# Altium PCB Control_Board_Model_C_Rigid_Flex_Flipped.PcbDoc (part 3 of 8)
Units mil, origin at the board's own origin, x right, y up, seen from the top; angles counter-clockwise.
Board outline 3417.32 x 2110.24 mil, 6 copper layers (1-Sig/GND, 2-Sig, 3-GND, 4-Sig/Pwr, 5-Sig, 6-Sig/GND), stack 39.291 mil thick; 418 components, 342 nets, 1601 pads, 44 vias.
Unrouted connection lines stored in the file: 13.
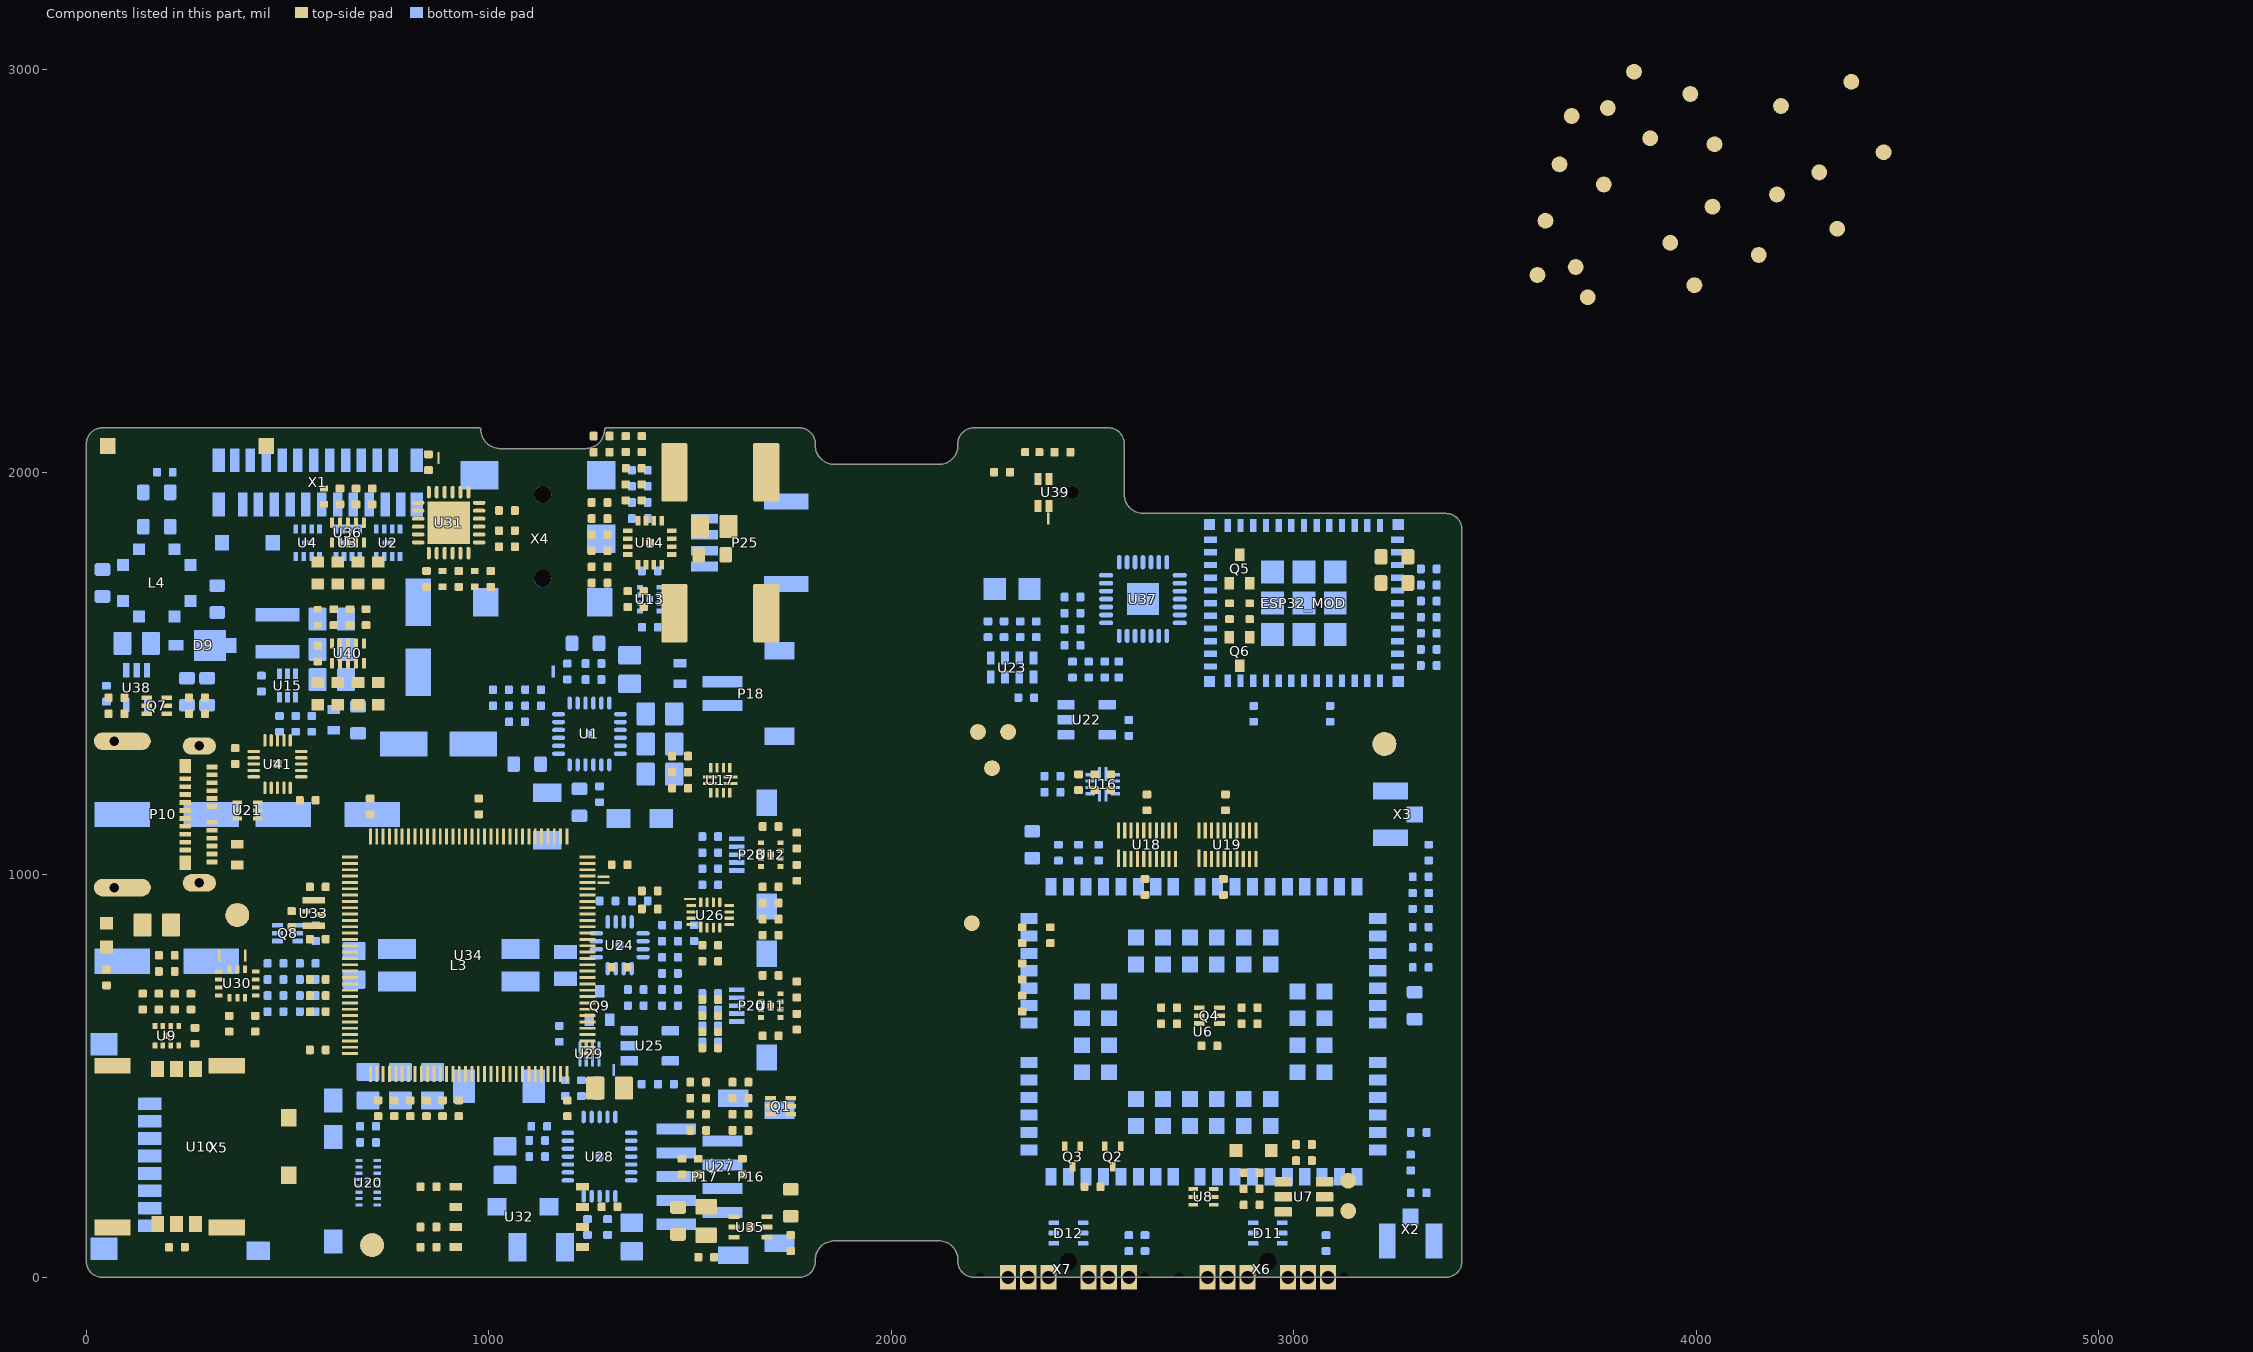
[diagram p6: the components of this part, seen from the top]

## Part data (continued)
C14 C15 C16 C17 C19 C20 C33 C34 C35 C36 C50 C53 C54 C55 C56 C57 C58 C60 C64 C65 C66 C67 C71 C72 C74 C82 C85 C88 C93 C94 C99 C104 C105 C106 C108 C109 C110 C111 C112 C113 C114 C115 C116 C118 C120 C130 C133 C135 C139 C145 C146 C148: "0.1µF ±10% 50V Ceramic Capacitor X7R 0402 (1005 Metric)", Capacitance=100nF, Case/Package=0402, Case Code (Metric)=1005, Dielectric=X7R, Manufacturer=TDK, Manufacturer Part Number=CGA2B3X7R1H104K050BB, Max Operating Temperature=125°C, Min Operating Temperature=-55°C, Package Quantity=1, Ratings=AEC-Q200, Supplier Part Number 1=445-6899-1-ND, Tolerance=10%, Voltage=50V, Case Code (Imperial)=0402, ComponentLink1Description=http://product.tdk.com/capacitor/mlcc/en/documents/mlccspec_automotive_general_midvoltage_en.pdf?src-supplier=Future+Electronics, ComponentLink1URL=http://product.tdk.com/capacitor/mlcc/en/documents/mlccspec_automotive_general_midvoltage_en.pdf?src-supplier=Future+Electronics, ComponentLink2Description=http://www.farnell.com/datasheets/1807242.pdf?src-supplier=Element14, ComponentLink2URL=http://www.farnell.com/datasheets/1807242.pdf?src-supplier=Element14, ComponentLink3Description=http://www.mouser.com/ds/2/400/lcc_automotive_general_en-843974.pdf?src-supplier=Mouser, ComponentLink3URL=http://www.mouser.com/ds/2/400/lcc_automotive_general_en-843974.pdf?src-supplier=Mouser, ComponentLink4Description=http://www.farnell.com/datasheets/1936565.pdf?src-supplier=Element14, ComponentLink4URL=http://www.farnell.com/datasheets/1936565.pdf?src-supplier=Element14, ComponentLink5Description=http://www.farnell.com/datasheets/1735392.pdf?src-supplier=Element14, ComponentLink5URL=http://www.farnell.com/datasheets/1735392.pdf?src-supplier=Element14, Composition=Ceramic, Depth=0.5mm, Height=0.5mm, Lead Free="Lead Free", Length=1mm, Mount="Surface Mount", Packaging="Tape and Reel", Pricing 1="1=0.17, 10=0.118, 50=0.0668, 100=0.0553, 500=0.0388, 1000=0.0321, 2500=0.0299, 5000=0.0273 (USD)", REACH SVHC="No SVHC", Stock 1=2925303, Supplier 1=Digi-Key, Termination=SMD/SMT, Thickness=0.022inch, Voltage Rating=50V, Voltage Rating (DC)=50V, Weight=2.3E-05oz, Width=0.02inch
  C17 C19 C20: ClassName=P109
  C64 C65 C66: ClassName=STM32G473CETx
  C105: ClassName=MCU
C18 C59 C83 C84: "2.2µF ±20% 6.3V Ceramic Capacitor X5R 0402 (1005 Metric)", Capacitance=2.2uF, Case/Package=0402, Case Code (Metric)=1005, Dielectric=X5R, Manufacturer=Murata, Manufacturer Part Number=GRM155R60J225ME15D, Max Operating Temperature=85°C, Min Operating Temperature=-55°C, Package Quantity=10000, Supplier Part Number 1=490-4519-1-ND, Tolerance=20%, Voltage=6.3V, Case Code (Imperial)=0402, ComponentLink1Description=https://www.murata.com/~/media/webrenewal/support/library/catalog/products/capacitor/mlcc/c02e.ashx?la=en-us&src-supplier=Digi-Key, ComponentLink1URL=https://www.murata.com/~/media/webrenewal/support/library/catalog/products/capacitor/mlcc/c02e.ashx?la=en-us&src-supplier=Digi-Key, ComponentLink2Description=http://www.murata.com/~/media/webrenewal/support/library/catalog/products/capacitor/mlcc/c02e.ashx?src-supplier=Avnet, ComponentLink2URL=http://www.murata.com/~/media/webrenewal/support/library/catalog/products/capacitor/mlcc/c02e.ashx?src-supplier=Avnet, ComponentLink3Description=http://www.farnell.com/datasheets/2047859.pdf?src-supplier=Element14, ComponentLink3URL=http://www.farnell.com/datasheets/2047859.pdf?src-supplier=Element14, ComponentLink4Description=https://produktinfo.conrad.com/datenblaetter/450000-474999/450128-da-01-de-VS_KONDENS_GRM155_R60J_225ME15D.pdf?src-supplier=Conrad, ComponentLink4URL=https://produktinfo.conrad.com/datenblaetter/450000-474999/450128-da-01-de-VS_KONDENS_GRM155_R60J_225ME15D.pdf?src-supplier=Conrad, Depth=0.5mm, Height=0.5mm, Lead Free="Lead Free", Length=1mm, Material=Ceramic, Mount="Surface Mount", Packaging="Tape and Reel", Pricing 1="1=0.29, 10=0.199, 100=0.1009, 500=0.0691, 1000=0.0611, 2500=0.0584, 5000=0.0531 (USD)", Radiation Hardening=No, REACH SVHC="No SVHC", Stock 1=4444410, Supplier 1=Digi-Key, Termination=SMD/SMT, Thickness=0.022inch, Voltage Rating=6.3V, Voltage Rating (DC)=6.3V, Width=0.02inch
  C18: ClassName=P109
C21 C22: "33pF ±5% 50V Ceramic Capacitor C0G, NP0 0402 (1005 Metric)", Capacitance=33pF, Case/Package=0402, Case Code (Metric)=1005, Dielectric=C0G, Dielectric Material=Ceramic, Insulation Resistance=100GR, Manufacturer=Yageo, Manufacturer Part Number=CC0402JRNPO9BN330, Max Operating Temperature=125°C, Min Operating Temperature=-55°C, Package Quantity=1, Supplier Part Number 1=311-1020-1-ND, Tolerance=5%, Voltage Rating=50V, Case Code (Imperial)=0402, ClassName=P109, ComponentLink1Description=https://www.verical.com/server-webapp/html/getDatasheet?partID=403453&src-supplier=Verical, ComponentLink1URL=https://www.verical.com/server-webapp/html/getDatasheet?partID=403453&src-supplier=Verical, ComponentLink2Description=http://www.farnell.com/datasheets/2213336.pdf?src-supplier=Element14, ComponentLink2URL=http://www.farnell.com/datasheets/2213336.pdf?src-supplier=Element14, ComponentLink3Description=http://www.mouser.com/ds/2/447/Yageo_UPY-GP_NP0_16V-to-50V_9-358835.pdf?src-supplier=Mouser, ComponentLink3URL=http://www.mouser.com/ds/2/447/Yageo_UPY-GP_NP0_16V-to-50V_9-358835.pdf?src-supplier=Mouser, ComponentLink4Description=http://www.yageo.com/documents/recent/UPY-GP_NP0_16V-to-50V_16.pdf?src-supplier=Digi-Key, ComponentLink4URL=http://www.yageo.com/documents/recent/UPY-GP_NP0_16V-to-50V_16.pdf?src-supplier=Digi-Key, ComponentLink5Description=http://www.yageo.com/documents/recent/UPY-GP_NP0_16V-to-50V_8.pdf?src-supplier=Avnet+Europe, ComponentLink5URL=http://www.yageo.com/documents/recent/UPY-GP_NP0_16V-to-50V_8.pdf?src-supplier=Avnet+Europe, Composition=Ceramic, Depth=0.5mm, Height=0.5mm, Lead Free="Lead Free", Length=1mm, Mount="Surface Mount", Number of Pins=2, Packaging="Tape and Reel", Pricing 1="1=0.1, 10=0.022, 100=0.0099, 500=0.0071, 1000=0.0056, 2500=0.0051, 5000=0.0047 (USD)", Radiation Hardening=No, REACH SVHC="No SVHC", Stock 1=622219, Supplier 1=Digi-Key, Termination=SMD/SMT, Thickness=0.022inch, Voltage Rating (DC)=50V, Weight=2.3E-05oz, Width=0.5mm
C23 C24 C96: "10pF ±10% 50V Ceramic Capacitor C0G, NP0 0402 (1005 Metric)", Capacitance=10pF, Case/Package=0402, Case Code (Metric)=1005, Dielectric=C0G, Dielectric Material=Ceramic, Manufacturer=KEMET, Manufacturer Part Number=C0402C100K5GACTU, Max Operating Temperature=125°C, Min Operating Temperature=-55°C, Package Quantity=10000, Supplier Part Number 1=399-7747-1-ND, Tolerance=10%, Voltage Rating=50V, Case Code (Imperial)=0402, ComponentLink1Description=http://www.mouser.com/ds/2/212/KEM_C1003_C0G_SMD-1101588.pdf?src-supplier=Mouser, ComponentLink1URL=http://www.mouser.com/ds/2/212/KEM_C1003_C0G_SMD-1101588.pdf?src-supplier=Mouser, Depth=0.5mm, Dissipation Factor=0.1%, Height=0.5mm, Lead Free="Lead Free", Lead Pitch=0.3mm, Length=1mm, Mount="Surface Mount", Packaging="Tape and Reel", Pricing 1="1=0.1, 10=0.021, 50=0.0116, 100=0.0095, 500=0.0068, 1000=0.0053, 2500=0.0048, 5000=0.0045 (USD)", Radiation Hardening=No, REACH SVHC="No SVHC", Stock 1=57093, Supplier 1=Digi-Key, Termination=SMD/SMT, Thickness=0.022inch, Voltage Rating (DC)=50V, Width=0.02inch
  C23 C24: ClassName=P109
C25 C26: "100µF 6.3V Aluminum Electrolytic Capacitors Radial, Can - SMD  2000 Hrs @ 105°C", Capacitance=100uF, Capacitance Tolerance=+/-20%, Case/Package=Radial, Leakage Current=6.3uA, Manufacturer="Wurth Elektronik", Manufacturer Part Number=865080142007, Max Operating Temperature=105°C, Min Operating Temperature=-55°C, Operating Temperature="-55 to +105degC", Package Quantity=1000, Ripple Current=170mA, Supplier Part Number 1=732-8472-1-ND, Tolerance=20%, Voltage Rating=6.3V, ClassName=P109, ComponentLink1Description=Manufacturer, ComponentLink1URL=http://www.we-online.de, ComponentLink2Description=Datasheet, ComponentLink2URL=https://www.we-online.com/catalog/datasheet/865080142007.pdf, ComponentLink3Description=http://www.farnell.com/datasheets/1880090.pdf?src-supplier=Farnell, ComponentLink3URL=http://www.farnell.com/datasheets/1880090.pdf?src-supplier=Farnell, ComponentLink4Description=http://www.farnell.com/datasheets/1880090.pdf?src-supplier=Newark, ComponentLink4URL=http://www.farnell.com/datasheets/1880090.pdf?src-supplier=Newark, ComponentLink5Description=http://katalog.we-online.de/pbs/datasheet/865080142007.pdf?src-supplier=Digi-Key, ComponentLink5URL=http://katalog.we-online.de/pbs/datasheet/865080142007.pdf?src-supplier=Digi-Key, ComponentLink6Description=http://www.farnell.com/datasheets/1880090.pdf?src-supplier=Element14, ComponentLink6URL=http://www.farnell.com/datasheets/1880090.pdf?src-supplier=Element14, ComponentLink7Description=https://katalog.we-online.de/pbs/datasheet/865080142007.pdf?src-supplier=Digi-Key, ComponentLink7URL=https://katalog.we-online.de/pbs/datasheet/865080142007.pdf?src-supplier=Digi-Key, Diameter=5mm, Dissipation Factor=24%, Endurance=2000h, Height=5.5mm, Height - Seated (Max)=0.217inch, Impedance=800mR, Life (Hours)=2000Hour, Mount="Surface Mount", Mounting Technology=SMT, Packaging="Tape and Reel", Polarity=Polar, Pricing 1="1=0.2, 50=0.167, 100=0.145, 250=0.129, 500=0.113 (USD)", Published Date="May 2020", REACH SVHC=Unknown, Ripple Current (AC)=170mA, Stock 1=2227, Supplier 1=Digi-Key, Technical Reference=ASEC055101M6R3DVCTBB000, Voltage Rating (DC)=6.3V
C27 C28 C29 C30 C40 C41 C42: library part "CAP CER NO_BOM 0402", "Placeholder for a 0402 capacitor"
  C27 C28 C29 C30: ClassName=P109